# EAGLE board Shield (EAGLE 7.6.0)
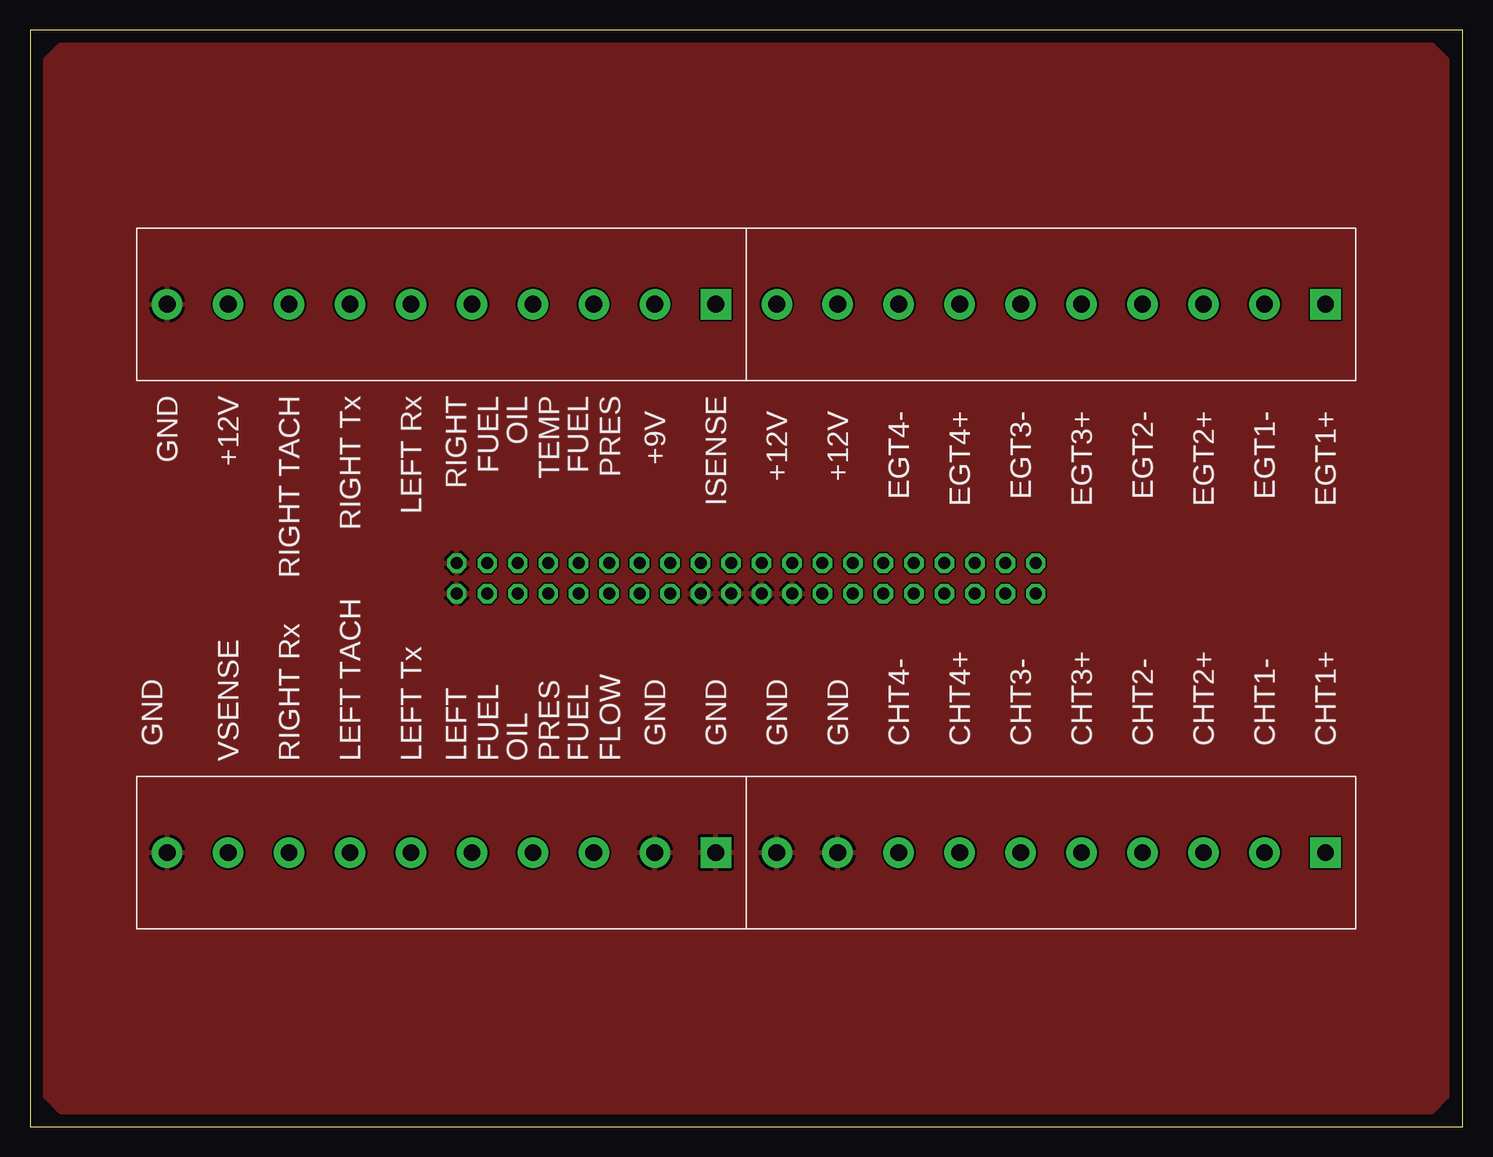
[diagram p0: board, top side]
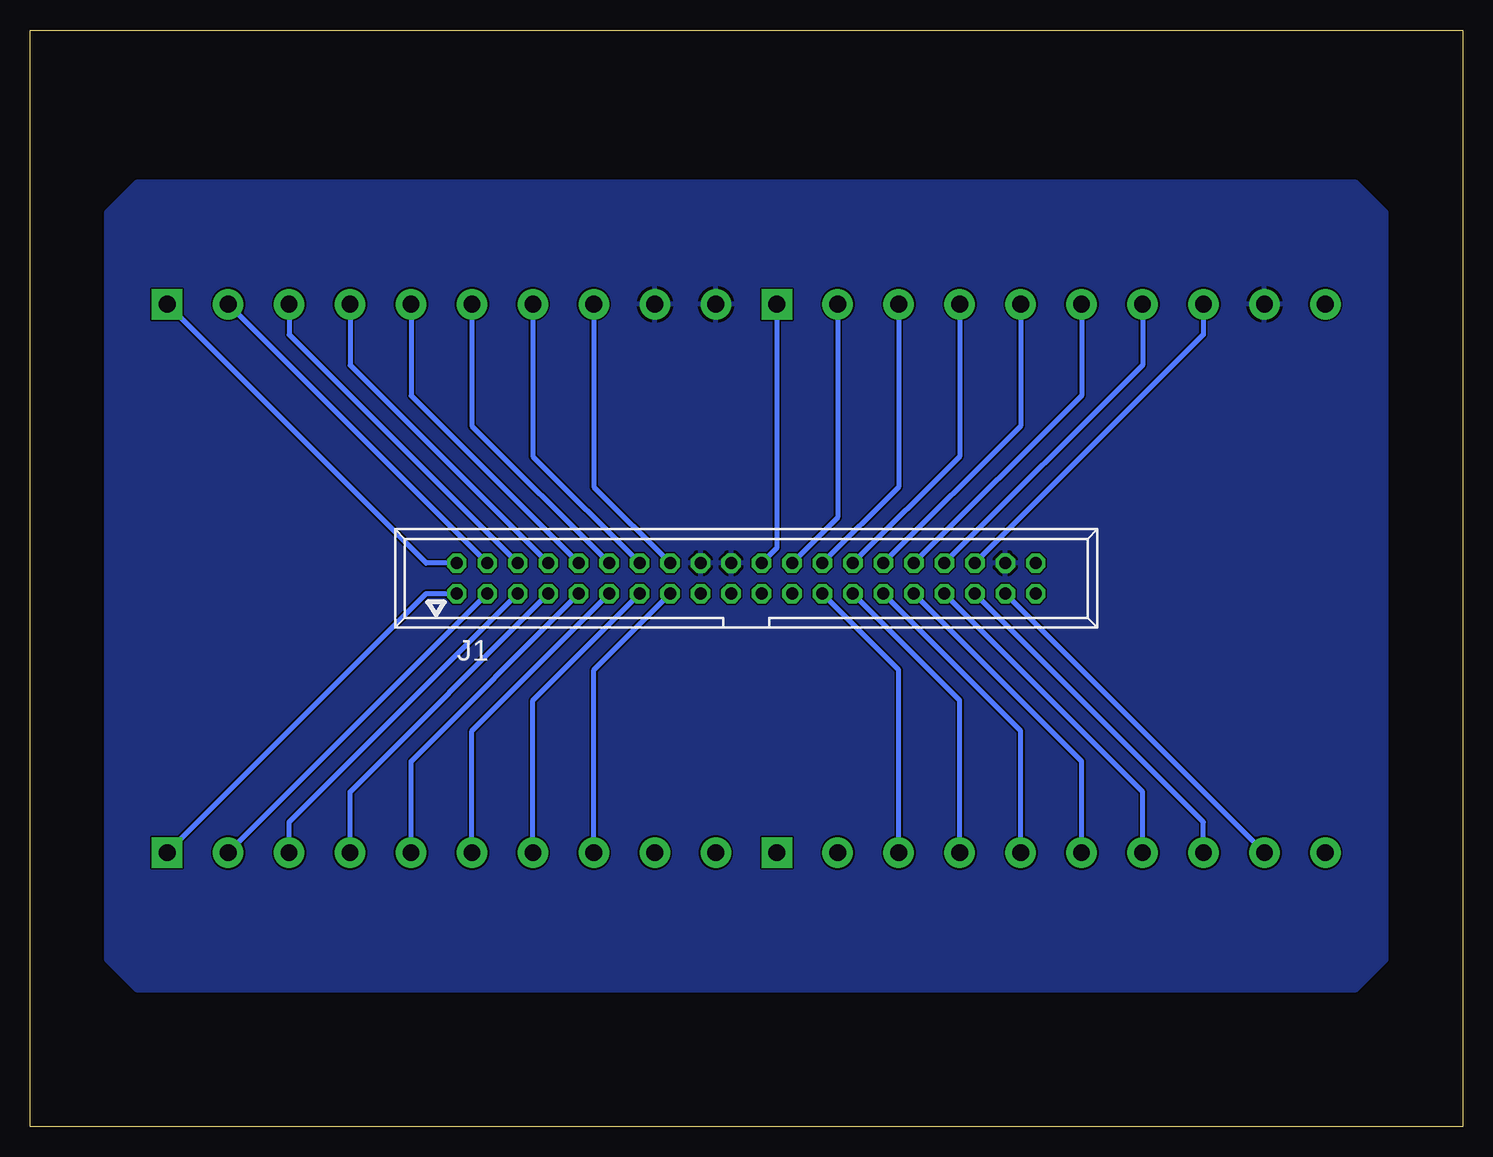
[diagram p1: board, bottom side, seen from below]

Size 119.38 x 91.44 mm. Coordinates in mm from the lower left corner, seen from the top.
Outline: 0,0 119.38,0 119.38,91.44 0,91.44 0,0
Copper layers (1*16): Top 0.035mm / dielectric 1.5mm / Bottom 0.035mm
Design rules "DFRobot_Eagle_Rule_v0.4": minimum track width 6mil, minimum drill 12mil, track to track 6mil, track to pad 6mil, pad to pad 6mil, via to via 6mil, smd to smd 0mil, copper to edge 10mil, drill to drill 10mil, minimum pad ring 12mil, minimum via ring 8mil, stop-mask expansion 2mil, vias tented up to drill 25mil, thermal gap 10mil

## Footprints (pad centres in the part's own frame; a part is rotated, then mirrored left to right if it is on the bottom)
057-040-1 = drill 1 octagon: 1 -24.13,-1.27; 2 -24.13,1.27; 3 -21.59,-1.27; 4 -21.59,1.27; 5 -19.05,-1.27; 6 -19.05,1.27; 7 -16.51,-1.27; 8 -16.51,1.27; 9 -13.97,-1.27; 10 -13.97,1.27; 11 -11.43,-1.27; 12 -11.43,1.27; 13 -8.89,-1.27; 14 -8.89,1.27; 15 -6.35,-1.27; 16 -6.35,1.27; 17 -3.81,-1.27; 18 -3.81,1.27; 19 -1.27,-1.27; 20 -1.27,1.27; 21 1.27,-1.27; 22 1.27,1.27; 23 3.81,-1.27; 24 3.81,1.27; 25 6.35,-1.27; 26 6.35,1.27; 27 8.89,-1.27; 28 8.89,1.27; 29 11.43,-1.27; 30 11.43,1.27; 31 13.97,-1.27; 32 13.97,1.27; 33 16.51,-1.27; 34 16.51,1.27; 35 19.05,-1.27; 36 19.05,1.27; 37 21.59,-1.27; 38 21.59,1.27; 39 24.13,-1.27; 40 24.13,1.27
282847-10 = drill 1.4 pad 2.54 square: 1 0,0 | drill 1.4 pad 2.54: 2 5.08,0; 3 10.16,0; 4 15.24,0; 5 20.32,0; 6 25.4,0; 7 30.48,0; 8 35.56,0; 9 40.64,0; 10 45.72,0

## Placement (x,y rotation side)
J1  057-040-1  [057-040-1]  59.69,45.72 0 bottom
TB1  282847-10  [282847-10]  57.15,22.86 180 top
TB2  282847-10  [282847-10]  107.95,22.86 180 top
TB3  282847-10  [282847-10]  57.15,68.58 180 top
TB4  282847-10  [282847-10]  107.95,68.58 180 top

## Library data of the parts
J1 = con-panduit-changed; OC_FARNELL: unknown; OC_NEWARK: unknown; PARTNO: SBH11-PBPC-D20-ST-BK
TB1-TB4 = TEConnectivity; PARTNO: 1-282847-0

## Nets
+12V: J1.18 J1.20 J1.38 TB3.9 TB4.9 TB4.10
GND: J1.17 J1.19 J1.21 J1.23 J1.39 J1.40 TB1.1 TB1.2 TB1.10 TB2.9 TB2.10 TB3.10
N$1: J1.1 TB2.1
N$2: J1.3 TB2.2
N$3: J1.5 TB2.3
N$4: J1.7 TB2.4
N$5: J1.9 TB2.5
N$6: J1.11 TB2.6
N$7: J1.13 TB2.7
N$8: J1.15 TB2.8
N$9: J1.2 TB4.1
N$10: J1.4 TB4.2
N$11: J1.6 TB4.3
N$12: J1.8 TB4.4
N$14: J1.12 TB4.6
N$15: J1.14 TB4.7
N$16: J1.16 TB4.8
N$20: J1.25 TB1.3
N$21: J1.27 TB1.4
N$22: J1.29 TB1.5
N$23: J1.31 TB1.6
N$24: J1.33 TB1.7
N$25: J1.35 TB1.8
N$26: J1.37 TB1.9
N$28: J1.10 TB4.5
N$31: J1.22 TB3.1
N$32: J1.24 TB3.2
N$33: J1.26 TB3.3
N$34: J1.28 TB3.4
N$35: J1.30 TB3.5
N$36: J1.32 TB3.6
N$37: J1.34 TB3.7
N$38: J1.36 TB3.8

## Tracks (layer width: path | path; a pad name or v marks a point on that pad's centre or on a via)
+12V
  pour Bottom: 6.35,76.2 8.89,78.74 110.49,78.74 113.03,76.2 113.03,13.97 110.49,11.43 8.89,11.43 6.35,13.97
GND
  pour Top: 2.54,90.17 1.27,88.9 1.27,2.54 2.54,1.27 96.52,1.27 116.84,1.27 118.11,2.54 118.11,88.9 116.84,90.17 22.86,90.17
N$1
  Bottom 0.406: TB2.1 86.36,44.45 J1.1
N$2
  Bottom 0.406: TB2.2 J1.3
N$3
  Bottom 0.406: TB2.3 97.79,25.4 J1.5
N$4
  Bottom 0.406: TB2.4 92.71,27.94 J1.7
N$5
  Bottom 0.406: TB2.5 87.63,30.48 J1.9
N$6
  Bottom 0.406: TB2.6 82.55,33.02 J1.11
N$7
  Bottom 0.406: TB2.7 77.47,35.56 J1.13
N$8
  Bottom 0.406: TB2.8 72.39,38.1 J1.15
N$9
  Bottom 0.406: J1.2 86.36,46.99 TB4.1
N$10
  Bottom 0.406: TB4.2 J1.4
N$11
  Bottom 0.406: TB4.3 97.79,66.04 J1.6
N$12
  Bottom 0.406: TB4.4 92.71,63.5 J1.8
N$14
  Bottom 0.406: TB4.6 82.55,58.42 J1.12
N$15
  Bottom 0.406: TB4.7 77.47,55.88 J1.14
N$16
  Bottom 0.406: TB4.8 72.39,53.34 J1.16
N$20
  Bottom 0.406: TB1.3 46.99,38.1 J1.25
N$21
  Bottom 0.406: TB1.4 41.91,35.56 J1.27
N$22
  Bottom 0.406: TB1.5 36.83,33.02 J1.29
N$23
  Bottom 0.406: TB1.6 31.75,30.48 J1.31
N$24
  Bottom 0.406: TB1.7 26.67,27.94 J1.33
N$25
  Bottom 0.406: TB1.8 21.59,25.4 J1.35
N$26
  Bottom 0.406: TB1.9 J1.37
N$28
  Bottom 0.406: TB4.5 87.63,60.96 J1.10
N$31
  Bottom 0.406: TB3.1 57.15,48.26 J1.22
N$32
  Bottom 0.406: TB3.2 52.07,50.8 J1.24
N$33
  Bottom 0.406: TB3.3 46.99,53.34 J1.26
N$34
  Bottom 0.406: TB3.4 41.91,55.88 J1.28
N$35
  Bottom 0.406: TB3.5 36.83,58.42 J1.30
N$36
  Bottom 0.406: TB3.6 31.75,60.96 J1.32
N$37
  Bottom 0.406: TB3.7 26.67,63.5 J1.34
N$38
  Bottom 0.406: TB3.8 21.59,66.04 J1.36

## Text on the board
tNames: GND | +12V | RIGHT TACH | RIGHT Tx | LEFT Rx | RIGHT / FUEL | OIL / TEMP | FUEL / PRES | ISENSE | +9V | +12V | +12V | EGT4- | EGT4+ | EGT3- | EGT3+ | EGT2- | EGT2+ | EGT1- | EGT1+ | GND | GND | GND | GND | GND | CHT4- | CHT4+ | CHT3- | CHT3+ | CHT2- | CHT2+ | CHT1- | CHT1+ | VSENSE | RIGHT Rx | LEFT TACH | LEFT Tx | LEFT / FUEL | OIL / PRES | FUEL / FLOW